# EAGLE board Frantic Juttuli (EAGLE 7.6.0)

Size 56.82 x 53.33 mm. Coordinates in mm from the lower left corner, seen from the top.
Outline: 0,0 56.82,0 56.82,53.33 0,53.33 0,0
Copper layers (1*16): Top 0.035mm / dielectric 1.5mm / Bottom 0.035mm
Design rules "default": minimum track width 10mil, minimum drill 24mil, track to track 8mil, track to pad 8mil, pad to pad 8mil, via to via 8mil, smd to smd 8mil, copper to edge 40mil, drill to drill 8mil, minimum pad ring 10mil, minimum via ring 8mil, stop-mask expansion 4mil, vias tented up to drill 0mil, thermal gap 10mil

## Footprints (pad centres in the part's own frame; a part is rotated, then mirrored left to right if it is on the bottom)
D-7.5 = drill 0.813 long: A 3.81,0; C -3.81,0
DC-POWER = drill 0.889 pad 2.54 octagon: + 0,2.54; - 0,-2.54
2P-2.54-65/35MIL = drill 0.889 pad 1.651 square: 1 0,1.27 | drill 0.889 pad 1.651: 2 0,-1.27
0207/10 = drill 0.813 octagon: 1 -5.08,0; 2 5.08,0
DIL08 = drill 0.813 pad 1.27: 1 -3.81,-3.81; 2 -1.27,-3.81; 3 1.27,-3.81; 4 3.81,-3.81; 5 3.81,3.81; 6 1.27,3.81; 7 -1.27,3.81; 8 -3.81,3.81

## Placement (x,y rotation side)
D1  [D-7.5]  5,48.18 0 top
D2  [D-7.5]  5,60.88 0 top  (outside the outline)
FUNC1  [DC-POWER]  5,98.98 0 top  (outside the outline)
Psource  9V  [2P-2.54-65/35MIL]  5,35.48 0 top
RR2  220k‎Ω  [0207/10]  5,86.28 0 top  (outside the outline)
RR3  220k‎Ω  [0207/10]  5,111.68 0 top  (outside the outline)
RR4  220k‎Ω  [0207/10]  5,73.58 0 top  (outside the outline)
RR5  220k‎Ω  [0207/10]  5,124.38 0 top  (outside the outline)
U1  [DIL08]  5,10.08 0 top
U2  [DIL08]  5,22.78 0 top
U3  [DC-POWER]  5,137.08 0 top  (outside the outline)
U4  [DC-POWER]  5,149.78 0 top  (outside the outline)
U5  [DC-POWER]  5,162.48 0 top  (outside the outline)
U6  [DC-POWER]  5,175.18 0 top  (outside the outline)
U7  [DC-POWER]  5,187.88 0 top  (outside the outline)

## Library data of the parts
D1 D2 FUNC1 Psource RR2-RR5 U1-U7 = AUTODESK_CIRCUITS_BREADBOARD

## Nets
N$1: Psource.2 U1.7 U2.7
N$2: D1.A D2.C U1.6 U5.+
N$3: D2.A RR2.2 RR3.1 U4.+
N$4: D1.C RR4.2 U2.3 U6.+
N$5: FUNC1.+ RR2.1 RR4.1 U1.2 U3.+
N$6: FUNC1.- Psource.1 U1.3 U1.4 U2.4 U3.-
N$7: RR3.2 RR5.1 U2.2
N$8: RR5.2 U2.6 U7.+
N$9: U4.- U5.- U6.- U7.-

## Tracks (layer width: path | path; a pad name or v marks a point on that pad's centre or on a via)
N$1  (2 unrouted)
N$2  (3 unrouted)
N$3  (3 unrouted)
N$4  (3 unrouted)
N$5  (4 unrouted)
N$6  (5 unrouted)
N$7  (2 unrouted)
N$8  (2 unrouted)
N$9  (3 unrouted)